# EAGLE board loud-flashy-driver.postroute (EAGLE 7.2.0)
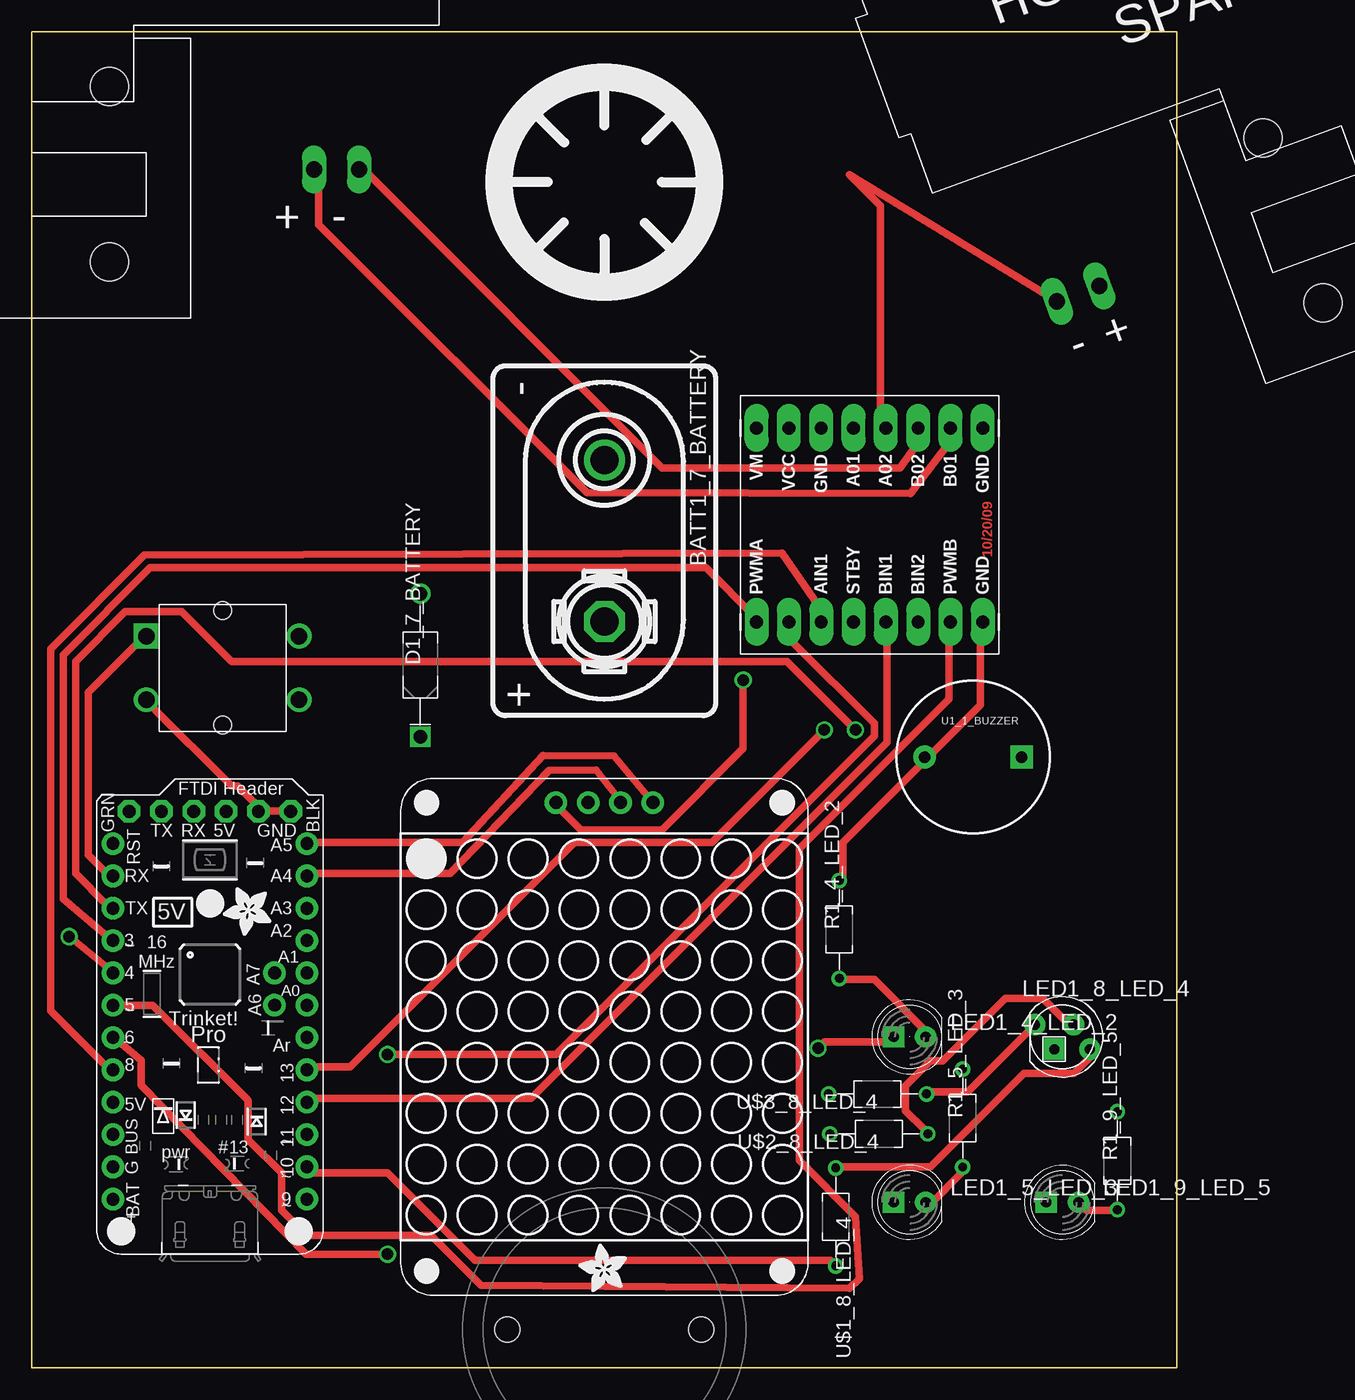
[diagram p0: board, top side]
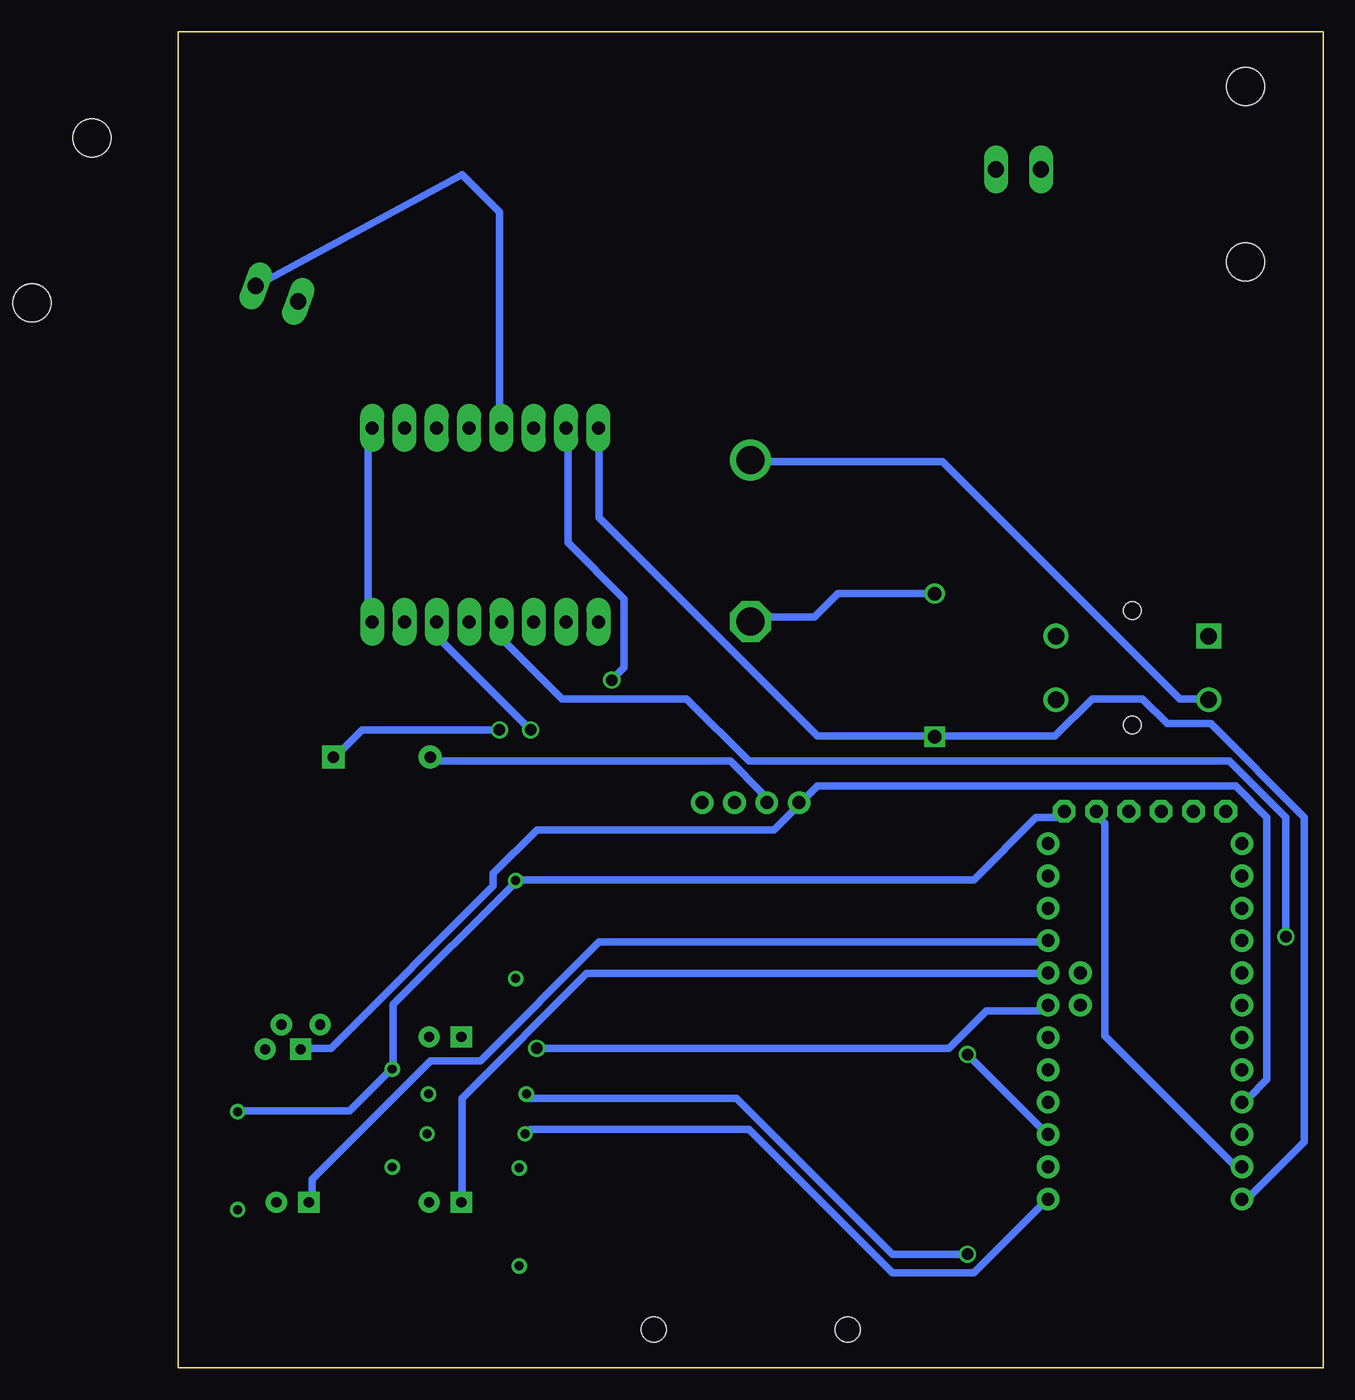
[diagram p1: board, bottom side, seen from below]

Size 90 x 105 mm. Coordinates in mm from the lower left corner, seen from the top.
Outline: 0,0 0,105 90,105 90,0 0,0
Copper layers (1*16): Top 0.035mm / dielectric 1.5mm / Bottom 0.035mm
Design rules "default *": minimum track width 0.6mm, minimum drill 0.9mm, track to track 15mil, track to pad 20mil, pad to pad 0.25mm, via to via 0.38mm, smd to smd 8mil, copper to edge 40mil, drill to drill 8mil, minimum pad ring 10mil, minimum via ring 8mil, stop-mask expansion 4mil, vias tented up to drill 0mil, thermal gap 10mil
vRestrict: area -45,59 to 34.4,132.6; area 28.9,5.6 to 61.1,46.4; area 28.9,48.5 to 32.2,61.9; area 33.8,4.8 to 56.2,27.2; area 34.8,49.8 to 55.2,80.2; area 35.2,83.2 to 54.8,102.8; area 5.1,8.3 to 22.9,46.3; area 55.6,59 to 135,132.6; area 55.6,56 to 76.1,76.5; area 61.8,20.2 to 71.2,22.8; area 61.9,7.2 to 64.5,16.5; area 61.9,17.1 to 71.3,19.7; 9 more areas

## Footprints (pad centres in the part's own frame; a part is rotated, then mirrored left to right if it is on the bottom)
BUTTON-TACTILE-SQUARE-ADAFRUIT1010 = drill 1.3 square: P -6,2.5 | drill 1.3: P2 6,2.5; S -6,-2.5; S2 6,-2.5 | hole 1.4: 0,-4.5; 0,4.5
BATTERY_9V_KEYSTONE_968 = drill 2.2: N 6.35,0 | drill 2.2 octagon: P -6.35,0
DIOAD1125W78L520D270_HS = drill 1.06 pad 1.59: A 5.625,0 | drill 1.06 pad 1.59 square: C -5.625,0
SPARKFUN_DUAL_MOTOR_DRIVER = drill 1.016 pad 1.88 long: A01 7.62,1.27; A02 7.62,-1.27; AIN1 -7.62,3.81; AIN2 -7.62,6.35; B01 7.62,-6.35; B02 7.62,-3.81; BIN1 -7.62,-1.27; BIN2 -7.62,-3.81; GND -7.62,-8.89; GND1 7.62,3.81; GND2 7.62,-8.89; PWMA -7.62,8.89; PWMB -7.62,-6.35; STBY -7.62,1.27; VCC 7.62,6.35; VM 7.62,8.89
SPARKFUN_HOBBY_MOTOR_LEFT = drill 1.27 long: + -41.18,-1.18; - -44.72,-1.18 | hole 3: -25.1,-7.7; -25.1,6.1
LED5MM = drill 0.813 pad 1.676 square: A -1.27,0 | drill 0.813 pad 1.676: K 1.27,0
LED5MMRGB = drill 0.8 pad 1.676: 1 -2.159,0.968; 3 0.889,0.968; 4 2.159,-0.968 | drill 0.8 pad 1.676 square: 2 -0.635,-0.968
RESAD770W45L370D210_HS = drill 0.7 pad 1.1: 1 -3.85,0; 2 3.85,0
SPARKFUN_HOBBY_MOTOR = drill 1.27 long: + 41.18,-1.18; - 44.72,-1.18 | hole 3: 25.1,-7.7; 25.1,6.1
BUZZER-12MM = drill 0.9 pad 1.778 square: + 3.81,0 | drill 0.9 pad 1.778: - -3.81,0
ADAFRUIT-1.2IN-8X8-LED-BACKPACK = drill 1.016 pad 1.778: GND -18.415,-1.27; SCL -18.415,3.81; SDA -18.415,1.27; VDD -18.415,-3.81
ADAFRUIT-3/4IN-CASTER = hole 2: -7.62,0; 7.62,0
ADAFRUIT-PRO-TRINKET-5V = drill 1.016 pad 1.778: +5V 7.62,24.13; A0 -7.62,16.51; A1 -7.62,13.97; A2 -7.62,11.43; A3 -7.62,8.89; A4 -7.62,6.35; A5 -7.62,3.81; AREF -7.62,19.05; D3 7.62,11.43; D4 7.62,13.97; D5 7.62,16.51; D6 7.62,19.05; D8 7.62,21.59; D9 -7.62,31.75; D10 -7.62,29.21; D11 -7.62,26.67; D12 -7.62,24.13; D13 -7.62,21.59; GND2 7.62,29.21; RESET 7.62,3.81; RXD1 7.62,6.35; TXD1 7.62,8.89; VBAT 7.62,31.75; VBUS1 7.62,26.67 | drill 1 pad 1.778: A6 -5.08,16.51; A7 -5.08,13.97 | drill 1.016 pad 1.778 octagon: DTR/RTS 6.35,1.27; GND -6.35,1.27; GND1 -3.81,1.27; RXD 1.27,1.27; TXD 3.81,1.27; VBUS -1.27,1.27

## Placement (x,y rotation side)
B1_0_BUTTON  BUTTON-TACTILE-SQUARE  [BUTTON-TACTILE-SQUARE-ADAFRUIT1010]  15,55 0 top
BATT1_7_BATTERY  BATTERY-9V-VERTICAL  [BATTERY_9V_KEYSTONE_968]  45,65 90 top
D1_7_BATTERY  [DIOAD1125W78L520D270_HS]  30.53,55.22 90 top
DRVR_2_DRIVE  SPARKFUN_DUAL_MOTOR_DRIVER-BOB  [SPARKFUN_DUAL_MOTOR_DRIVER]  65.86,66.24 90 top
L_2_DRIVE  SOLARBOTICS_GM2_LEFTSPARKFUN_HOBBY  [SPARKFUN_HOBBY_MOTOR_LEFT]  -19,93 180 top
LED1_4_LED_2  [LED5MM]  69,26 0 top
LED1_5_LED_3  [LED5MM]  69,13 0 top
LED1_8_LED_4  RGBLED_CA-5MM  [LED5MMRGB]  81,26 0 top
LED1_9_LED_5  [LED5MM]  81,13 0 top
R1_4_LED_2  330  [RESAD770W45L370D210_HS]  63.47,34.44 90 top
R1_5_LED_3  330  [RESAD770W45L370D210_HS]  73.17,19.62 90 top
R1_9_LED_5  330  [RESAD770W45L370D210_HS]  85.32,16.27 90 top
R_2_DRIVE  SOLARBOTICS_GM2SPARKFUN_HOBBY  [SPARKFUN_HOBBY_MOTOR]  123,98 200 top
U1_1_BUZZER  [BUZZER-12MM]  74,48 0 top
U1_3_DISPLAY_2  [ADAFRUIT-1.2IN-8X8-LED-BACKPACK]  45,26 270 top
U1_6_CASTER  [ADAFRUIT-3/4IN-CASTER]  45,3 0 top
U1_10_BRAIN  [ADAFRUIT-PRO-TRINKET-5V]  14,45 180 top
U1_11_PENHOLDER  [PENHOLDER]  45,93.19 0 top
U$1_8_LED_4  100  [RESAD770W45L370D210_HS]  63.19,11.85 270 top
U$2_8_LED_4  100  [RESAD770W45L370D210_HS]  66.58,18.38 180 top
U$3_8_LED_4  150  [RESAD770W45L370D210_HS]  66.48,21.51 180 top

## Library data of the parts
B1_0_BUTTON BATT1_7_BATTERY L_2_DRIVE LED1_4_LED_2 LED1_5_LED_3 LED1_9_LED_5 R_2_DRIVE U1_1_BUZZER U1_6_CASTER U1_11_PENHOLDER = Components
D1_7_BATTERY = KoalaBuild; DATASHEET: http://www.st.com/web/en/resource/technical/document/datasheet/CD00001625.pdf; DB: /Users/sciencectn/Documents/nvsl/Gadgets/Libraries/Parts/Digikey/Schottky-Diodes-TH.csv; DEVICE: TH-DO-41-AND-DO-204AL; DIST: Digikey; DISTPN: 497-4547-1-ND; IMAGE: http://media.digikey.com/photos/STMicro%20Photos/1N5819.JPG; IRECT: 1A; MFR: STMicroelectronics; MIN_QTY: 1; MPN: 1N5817; PACKAGE: DIOAD1125W78L520D270_HS; PRICE: $0.57; SIZE: TH; STOCK: STOCK; VALUE: 450mV; VREV: 20V
DRVR_2_DRIVE U1_3_DISPLAY_2 U1_10_BRAIN = BOBs
LED1_8_LED_4 = Components; CREATOR: Swanson
R1_4_LED_2 R1_5_LED_3 R1_9_LED_5 = KoalaBuild; CASE: TH; DATASHEET: http://www.yageo.com/NewPortal/yageodocoutput?fileName=/pdf/throughhole/Yageo_LR_CFR_2013.pdf; DB: /Users/sciencectn/Documents/nvsl/Gadgets/Libraries/Parts/Digikey/Resistors-TH.csv; DEVICE: TH-1/6W-CARBON; DIST: Digikey; DISTPN: 330EBK-ND; IMAGE: http://media.digikey.com/Renders/Yageo%20Renders/CFR-12JR-330R.jpg; MFR: Yageo; MIN_QTY: 1; MPN: CFR-12JB-52-330R; PACKAGE: RESAD770W45L370D210_HS; PRICE: $0.10; PWR: 167mW; SIZE: TH; STOCK: STOCK; TOL: 5%; VALUE_QUERY: 330
U$1_8_LED_4 U$2_8_LED_4 = KoalaBuild; CASE: TH; DATASHEET: http://www.yageo.com/NewPortal/yageodocoutput?fileName=/pdf/throughhole/Yageo_LR_CFR_2013.pdf; DB: /Users/sciencectn/Documents/nvsl/Gadgets/Libraries/Parts/Digikey/Resistors-TH.csv; DEVICE: TH-1/6W-CARBON; DIST: Digikey; DISTPN: 100EBK-ND; IMAGE: http://media.digikey.com/Renders/Yageo%20Renders/CFR-12JR-100R.jpg; MFR: Yageo; MIN_QTY: 1; MPN: CFR-12JB-52-100R; PACKAGE: RESAD770W45L370D210_HS; PRICE: $0.10; PWR: 167mW; SIZE: TH; STOCK: STOCK; TOL: 5%; VALUE_QUERY: 100
U$3_8_LED_4 = KoalaBuild; CASE: TH; DATASHEET: http://www.yageo.com/NewPortal/yageodocoutput?fileName=/pdf/throughhole/Yageo_LR_CFR_2013.pdf; DB: /Users/sciencectn/Documents/nvsl/Gadgets/Libraries/Parts/Digikey/Resistors-TH.csv; DEVICE: TH-1/6W-CARBON; DIST: Digikey; DISTPN: 150EBK-ND; IMAGE: http://media.digikey.com/Renders/Yageo%20Renders/CFR-12JR-150R.jpg; MFR: Yageo; MIN_QTY: 1; MPN: CFR-12JB-52-150R; PACKAGE: RESAD770W45L370D210_HS; PRICE: $0.10; PWR: 167mW; SIZE: TH; STOCK: STOCK; TOL: 5%; VALUE_QUERY: 150

## Nets
+5V_10_BRAIN: DRVR_2_DRIVE.VCC LED1_8_LED_4.2 U1_3_DISPLAY_2.VDD U1_10_BRAIN.+5V
A0_10_BRAIN: LED1_4_LED_2.A U1_10_BRAIN.A0
A01_2_DRIVE: DRVR_2_DRIVE.A01 R_2_DRIVE.+
A1_10_BRAIN: LED1_5_LED_3.A U1_10_BRAIN.A1
A02_2_DRIVE: DRVR_2_DRIVE.A02 R_2_DRIVE.-
A2_10_BRAIN: LED1_9_LED_5.A U1_10_BRAIN.A2
A3_10_BRAIN: U1_10_BRAIN.A3
A4_10_BRAIN: U1_3_DISPLAY_2.SDA U1_10_BRAIN.A4
A5_10_BRAIN: U1_3_DISPLAY_2.SCL U1_10_BRAIN.A5
A6_10_BRAIN: U1_10_BRAIN.A6
A7_10_BRAIN: U1_10_BRAIN.A7
AREF_10_BRAIN: U1_10_BRAIN.AREF
B01_2_DRIVE: DRVR_2_DRIVE.B01 L_2_DRIVE.+
B02_2_DRIVE: DRVR_2_DRIVE.B02 L_2_DRIVE.-
D3_10_BRAIN: DRVR_2_DRIVE.PWMA U1_10_BRAIN.D3
D4_10_BRAIN: DRVR_2_DRIVE.STBY U1_10_BRAIN.D4
D5_10_BRAIN: DRVR_2_DRIVE.PWMB U1_10_BRAIN.D5
D6_10_BRAIN: U1_10_BRAIN.D6 U$3_8_LED_4.2
D8_10_BRAIN: DRVR_2_DRIVE.AIN1 U1_10_BRAIN.D8
D9_10_BRAIN: U1_10_BRAIN.D9 U$2_8_LED_4.2
D10_10_BRAIN: U1_10_BRAIN.D10 U$1_8_LED_4.2
D11_10_BRAIN: DRVR_2_DRIVE.AIN2 U1_10_BRAIN.D11
D12_10_BRAIN: DRVR_2_DRIVE.BIN1 U1_10_BRAIN.D12
D13_10_BRAIN: DRVR_2_DRIVE.BIN2 U1_10_BRAIN.D13
DTR/RTS_10_BRAIN: U1_10_BRAIN.DTR/RTS
GND1_2_DRIVE: DRVR_2_DRIVE.GND1
GND_0_BUTTON: B1_0_BUTTON.S BATT1_7_BATTERY.N DRVR_2_DRIVE.GND DRVR_2_DRIVE.GND2 R1_4_LED_2.2 R1_5_LED_3.2 R1_9_LED_5.2 U1_1_BUZZER.- U1_3_DISPLAY_2.GND U1_10_BRAIN.GND U1_10_BRAIN.GND1 U1_10_BRAIN.GND2
N$1_4_LED_2: LED1_4_LED_2.K R1_4_LED_2.1
N$1_5_LED_3: LED1_5_LED_3.K R1_5_LED_3.1
N$1_7_BATTERY: BATT1_7_BATTERY.P D1_7_BATTERY.A
N$1_8_LED_4: LED1_8_LED_4.4 U$1_8_LED_4.1
N$1_9_LED_5: LED1_9_LED_5.K R1_9_LED_5.1
N$2_8_LED_4: LED1_8_LED_4.3 U$2_8_LED_4.1
N$3_8_LED_4: LED1_8_LED_4.1 U$3_8_LED_4.1
RESET_10_BRAIN: U1_10_BRAIN.RESET
RXD1_10_BRAIN: B1_0_BUTTON.P U1_10_BRAIN.RXD1
RXD_10_BRAIN: U1_10_BRAIN.RXD
TXD1_10_BRAIN: U1_1_BUZZER.+ U1_10_BRAIN.TXD1
TXD_10_BRAIN: U1_10_BRAIN.TXD
VBUS1_10_BRAIN: U1_10_BRAIN.VBUS1
VBUS_10_BRAIN: U1_10_BRAIN.VBUS
VM_2_DRIVE: D1_7_BATTERY.C DRVR_2_DRIVE.VM U1_10_BRAIN.VBAT

## Tracks (layer width: path | path; a pad name or v marks a point on that pad's centre or on a via)
+5V_10_BRAIN  (via drill 0.9)
  Top 0.6: U1_3_DISPLAY_2.VDD 41.2,44.24 43.16,42.28 49.54,42.28 55.92,48.65 v55.92,54.05
  Bottom 0.6: v55.92,54.05 54.94,55.03 54.94,60.43 59.35,64.84 59.35,73.67 DRVR_2_DRIVE.VCC | U1_10_BRAIN.+5V 6.38,21.19 5.89,21.19 4.42,22.66 4.42,43.26 6.87,45.71 39.73,45.71 40.71,44.73 U1_3_DISPLAY_2.VDD 41.2,44.24 43.16,42.28 61.8,42.28 65.24,38.84 65.24,37.86 77.99,25.11 79.95,25.11 LED1_8_LED_4.2
A0_10_BRAIN  (via drill 0.9)
  Top 0.6: v61.8,25.11 62.29,25.6 67.69,25.6 LED1_4_LED_2.A
  Bottom 0.6: U1_10_BRAIN.A0 22.07,28.05 26.49,28.05 29.43,25.11 v61.8,25.11
A01_2_DRIVE
  Bottom 0.6: DRVR_2_DRIVE.A01 64.75,74.16 64.75,90.84 67.69,93.78 R_2_DRIVE.+
A1_10_BRAIN
  Bottom 0.6: U1_10_BRAIN.A1 22.07,31 57.88,31 67.69,21.19 67.69,13.34 LED1_5_LED_3.A
A02_2_DRIVE
  Top 0.6: R_2_DRIVE.- 64.25,93.78 66.71,91.33 66.71,74.16 DRVR_2_DRIVE.A02
A2_10_BRAIN
  Bottom 0.6: U1_10_BRAIN.A2 22.07,33.45 56.9,33.45 66.22,24.13 70.14,24.13 79.46,14.81 79.46,13.34 LED1_9_LED_5.A
A4_10_BRAIN
  Top 0.6: U1_10_BRAIN.A4 22.07,38.84 32.86,38.84 40.67,46.92 44.34,46.96 46.11,44.73 U1_3_DISPLAY_2.SDA
A5_10_BRAIN
  Top 0.6: U1_10_BRAIN.A5 22.07,41.3 33.84,41.3 40.2,48.11 45.77,48.1 48.56,44.73 U1_3_DISPLAY_2.SCL
B01_2_DRIVE
  Top 0.6: L_2_DRIVE.+ 22.56,93.78 22.56,89.86 43.65,68.77 69.07,68.69 72.1,72.69 72.1,73.67 DRVR_2_DRIVE.B01
B02_2_DRIVE
  Top 0.6: L_2_DRIVE.- 26,94.27 49.54,70.73 68.23,70.72 69.65,72.69 69.65,73.67 DRVR_2_DRIVE.B02
D3_10_BRAIN
  Top 0.6: DRVR_2_DRIVE.PWMA 56.9,58.95 52.97,62.88 9.32,62.88 2.45,56.01 2.46,36.85 5.89,33.94 6.38,33.94 U1_10_BRAIN.D3
D4_10_BRAIN  (via drill 0.9)
  Top 0.6: v2.93,33.88 5.89,31.49 6.38,31.49 U1_10_BRAIN.D4
  Bottom 0.6: v2.93,33.88 2.94,43.26 7.36,47.67 45.13,47.67 50.03,52.58 59.84,52.58 64.25,56.99 64.25,58.47 DRVR_2_DRIVE.STBY
D5_10_BRAIN
  Top 0.6: U1_10_BRAIN.D5 9.51,28.49 17,21 17,17.92 19.62,15.3 19.62,12.36 21.58,10.4 31.39,10.4 35.32,6.47 64.26,6.23 65.03,6.99 64.75,11.87 60.33,16.28 60.33,40.81 72.1,52.58 72.1,58.47 DRVR_2_DRIVE.PWMB
D6_10_BRAIN  (via drill 0.9)
  Top 0.6: v27.96,8.92 21.58,8.92 8.61,22.17 8.61,24.15 6.87,25.6 U1_10_BRAIN.D6
  Bottom 0.6: v27.96,8.92 33.84,8.92 46.11,21.19 62.29,21.19 U$3_8_LED_4.2
D8_10_BRAIN
  Top 0.6: U1_10_BRAIN.D8 6.38,23.64 5.89,23.64 1.47,28.05 1.47,56.5 8.83,63.86 58.95,64.05 61.8,59.94 61.8,58.95 DRVR_2_DRIVE.AIN1
D9_10_BRAIN
  Bottom 0.6: U1_10_BRAIN.D9 22.07,12.85 27.47,7.45 33.84,7.45 45.13,18.73 62.29,18.73 U$2_8_LED_4.2
D10_10_BRAIN
  Top 0.6: U1_10_BRAIN.D10 22.07,15.3 27.96,15.3 34.83,8.43 62.78,8.43 U$1_8_LED_4.2
D11_10_BRAIN  (via drill 0.9)
  Top 0.6: v27.96,24.62 41.2,24.62 66.22,49.64 66.22,50.62 59.84,56.99 59.84,58.47 DRVR_2_DRIVE.AIN2
  Bottom 0.6: U1_10_BRAIN.D11 22.07,18.73 v27.96,24.62
D12_10_BRAIN
  Top 0.6: U1_10_BRAIN.D12 22.07,21.19 39.24,21.19 67.2,49.15 67.2,58.47 DRVR_2_DRIVE.BIN1
D13_10_BRAIN  (via drill 0.9)
  Top 0.6: U1_10_BRAIN.D13 22.07,23.64 25.02,23.64 42.67,41.3 53.47,41.3 v62.29,50.13
  Bottom 0.6: v62.29,50.13 69.65,57.48 69.65,58.47 DRVR_2_DRIVE.BIN2
GND_0_BUTTON
  Top 0.6: 18.15,43.75 16.19,45.71 15.7,45.71 9.32,52.09 B1_0_BUTTON.S | 18.15,43.75 U1_10_BRAIN.GND1 | 18.15,43.75 20.11,43.75 U1_10_BRAIN.GND | R1_4_LED_2.2 63.77,38.35 63.77,41.3 70.14,47.67 U1_1_BUZZER.- 70.63,48.16 74.56,52.09 74.56,58.47 DRVR_2_DRIVE.GND
  Bottom 0.6: U1_10_BRAIN.GND1 17.66,43.26 17.17,42.77 17.17,26.09 6.87,15.79 U1_10_BRAIN.GND2 | U1_10_BRAIN.GND 20.6,43.26 22.56,43.26 27.47,38.35 63.27,38.35 R1_4_LED_2.2 63.77,37.86 73.08,28.54 73.08,23.64 R1_5_LED_3.2 73.58,23.15 76.52,20.21 84.86,20.21 R1_9_LED_5.2 | U1_3_DISPLAY_2.GND 44.15,44.73 44.15,45.22 46.6,47.67 70.14,47.67 U1_1_BUZZER.- | BATT1_7_BATTERY.N 44.64,71.22 29.92,71.22 11.28,52.58 9.32,52.58 B1_0_BUTTON.S | DRVR_2_DRIVE.GND 75.05,58.95 75.05,73.67 DRVR_2_DRIVE.GND2
N$1_4_LED_2
  Top 0.6: R1_4_LED_2.1 63.77,30.51 66.22,30.51 70.63,26.09 LED1_4_LED_2.K
N$1_5_LED_3
  Top 0.6: LED1_5_LED_3.K 70.63,12.85 73.08,15.3 R1_5_LED_3.1
N$1_7_BATTERY
  Bottom 0.6: D1_7_BATTERY.A 38.15,60.85 40,59 44.65,59 BATT1_7_BATTERY.P
N$1_8_LED_4
  Top 0.6: U$1_8_LED_4.1 63.27,15.79 70.63,15.79 77.99,23.15 81.91,23.15 83.39,24.62 LED1_8_LED_4.4
N$1_9_LED_5
  Top 0.6: LED1_9_LED_5.K 82.4,12.85 82.89,12.36 84.86,12.36 R1_9_LED_5.1
N$2_8_LED_4
  Top 0.6: U$2_8_LED_4.1 70.14,18.73 68.67,20.21 68.67,22.17 70.63,24.13 71.61,24.13 76.52,29.04 79.46,29.04 81.42,27.07 LED1_8_LED_4.3
N$3_8_LED_4
  Top 0.6: U$3_8_LED_4.1 70.63,21.68 73.58,21.68 78.48,26.58 LED1_8_LED_4.1
RXD1_10_BRAIN
  Top 0.6: U1_10_BRAIN.RXD1 6.38,38.84 5.89,38.84 4.42,40.32 4.42,53.07 8.83,57.48 B1_0_BUTTON.P
TXD1_10_BRAIN  (via drill 0.9)
  Top 0.6: U1_10_BRAIN.TXD1 6.38,36.39 5.89,36.39 3.43,38.84 3.43,55.52 7.36,59.45 11.77,59.45 15.7,55.52 59.35,55.52 v64.75,50.13
  Bottom 0.6: v64.75,50.13 75.54,50.13 77.5,48.16 U1_1_BUZZER.+
VM_2_DRIVE
  Bottom 0.6: DRVR_2_DRIVE.VM 56.9,73.67 56.9,66.8 39.73,49.64 30.9,49.64 D1_7_BATTERY.C 30.41,49.64 21.09,49.64 18.15,52.58 14.22,52.58 12.26,50.62 8.83,50.62 1.47,43.26 1.47,17.75 5.89,13.34 6.38,13.34 U1_10_BRAIN.VBAT